# EAGLE board ESP32_breakout v2 (EAGLE 7.7.0)
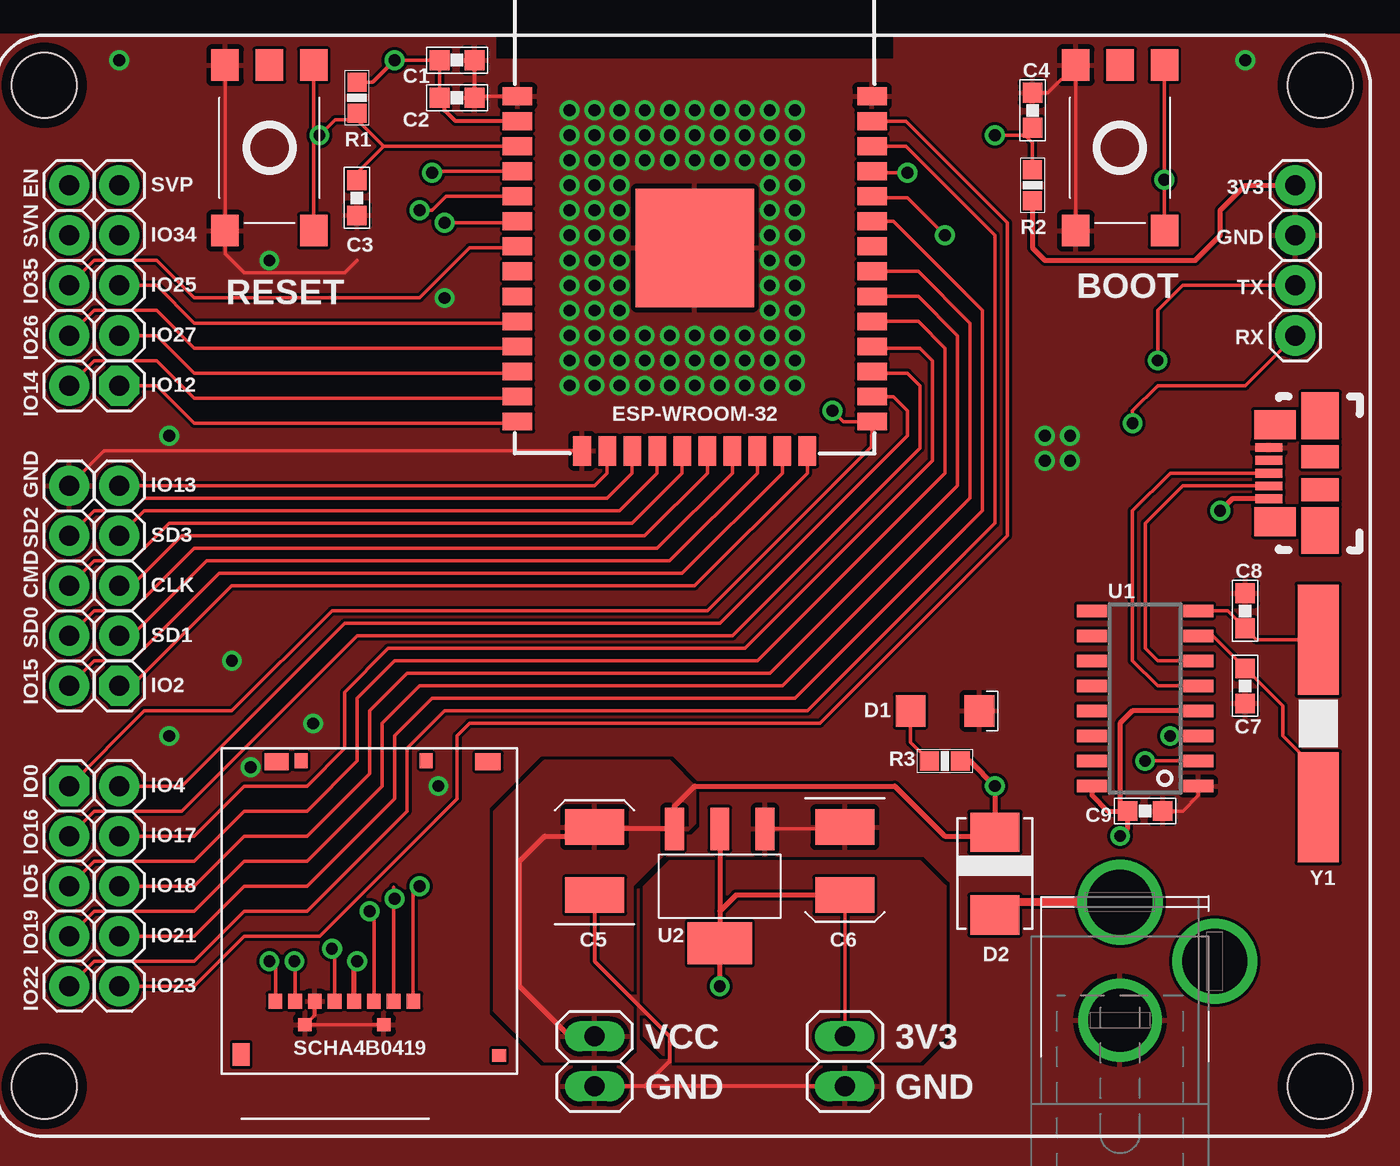
[diagram p0: board, top side]
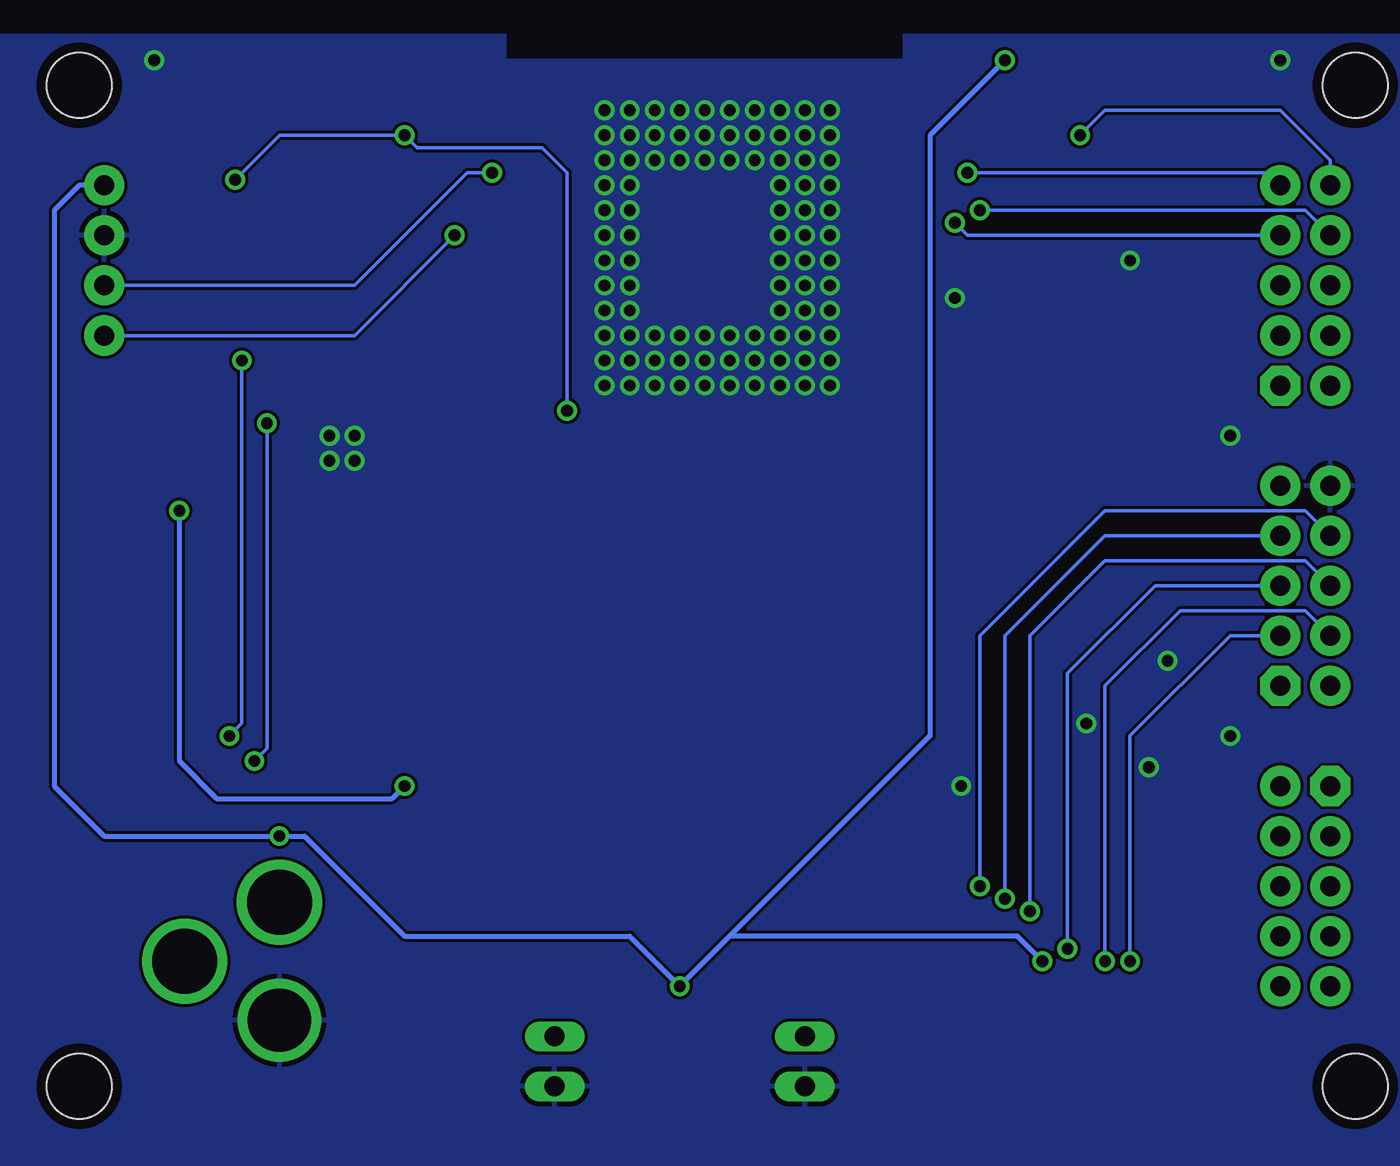
[diagram p1: board, bottom side, seen from below]

No outline drawn. Coordinates in mm, seen from the top.
Copper layers (1*16): Top 0.035mm / dielectric 1.5mm / Bottom 0.035mm
Design rules "embeddedadventures-2layer": minimum track width 6mil, minimum drill 19mil, track to track 6mil, track to pad 6mil, pad to pad 6mil, via to via 6mil, smd to smd 6mil, copper to edge 20mil, drill to drill 8mil, minimum pad ring 8mil, minimum via ring 8mil, stop-mask expansion 1mil, vias tented up to drill 24mil, thermal gap 10mil

## Footprints (pad centres in the part's own frame; a part is rotated, then mirrored left to right if it is on the bottom)
CAP-0603 = smd 1 x 1: 1 -0.889,0; 2 0.889,0
B-3528 = smd 1.8 x 3: N 1.725,0; P -1.725,0
LED-1206 = smd 1.5 x 1.6: A -1.75,0; C 1.75,0
10BQ015PB = smd 2 x 2.5: A 2.1,0; C -2.1,0
SPC4077 = drill 3.2: 1 -3,0 | drill 3.3: 2 0,-4.8; 3 3,0
RES-0603 = smd 0.965 x 0.965: 1 -0.787,0; 2 0.787,0
SKHMQME010 = smd 1.6 x 1.4: 1 -4.2,2.25; 2 4.2,2.25; 3 -4.2,-2.25; 4 4.2,-2.25; 5 4.2,0
ESP-WROOM-32 = smd 0.9 x 1.5: 1 7.7,9; 2 6.43,9; 3 5.16,9; 4 3.89,9; 5 2.62,9; 6 1.35,9; 7 0.08,9; 8 -1.19,9; 9 -2.46,9; 10 -3.73,9; 11 -5,9; 12 -6.27,9; 13 -7.54,9; 14 -8.81,9; 25 -8.81,-9; 26 -7.54,-9; 27 -6.27,-9; 28 -5,-9; 29 -3.73,-9; 30 -2.46,-9; 31 -1.19,-9; 32 0.08,-9; 33 1.35,-9; 34 2.62,-9; 35 3.89,-9; 36 5.16,-9; 37 6.43,-9; 38 7.7,-9 | smd 1.5 x 0.9: 15 -10.3,5.715; 16 -10.3,4.445; 17 -10.3,3.175; 18 -10.3,1.905; 19 -10.3,0.635; 20 -10.3,-0.635; 21 -10.3,-1.905; 22 -10.3,-3.175; 23 -10.3,-4.445; 24 -10.3,-5.715 | smd 6 x 6: GND 0,0
SOT-223-4 = smd 0.95 x 2.15: 1 -2.3,-2.9; 2 0,-2.9; 3 2.3,-2.9 | smd 3.25 x 2.15: PAD 0,2.9
1X02-LONG = drill 1.016 long: 1 -1.27,0; 2 1.27,0
2X05 = drill 1.016 pad 2.032 octagon: 1 -1.27,-2.54 | drill 1.016 pad 2.032: 2 -1.27,0; 3 1.27,-2.54; 4 1.27,0; 5 3.81,-2.54; 6 3.81,0; 7 6.35,-2.54; 8 6.35,0; 9 8.89,-2.54; 10 8.89,0
STAND-OFF-HOLE = hole 3.3: 0,0
MOLEX_47346-001 = smd 1.38 x 0.45: 1 2.61,1.3; 2 2.61,0.65; 3 2.61,0; 4 2.61,-0.65; 5 2.61,-1.3 | smd 2.1 x 1.475: P$1 2.3,2.462; P$2 2.3,-2.462 | smd 1.9 x 1.175: P$3 0,0.838; P$4 0,-0.838 | smd 1.9 x 2.375: P$5 0,2.913; P$6 0,-2.913
SOIC16 = smd 0.635 x 1.524: 1 -4.445,-2.695; 2 -3.175,-2.695; 3 -1.905,-2.695; 4 -0.635,-2.695; 5 0.635,-2.695; 6 1.905,-2.695; 7 3.175,-2.695; 8 4.445,-2.695; 9 4.445,2.695; 10 3.175,2.695; 11 1.905,2.695; 12 0.635,2.695; 13 -0.635,2.695; 14 -1.905,2.695; 15 -3.175,2.695; 16 -4.445,2.695
MICROSD_SCHA4B0419 = smd 0.7 x 0.75: 1 2.225,-12.825; 2 1.225,-12.825; 3 0.225,-12.825; 4 -0.775,-12.825; 5 -1.775,-12.825; 6 -2.775,-12.825; 7 -3.775,-12.825; 8 -4.775,-12.825 | smd 0.7 x 0.65: G1 -3.275,-14.025; G2 0.725,-14.025; P$1 6.575,-15.575 | smd 0.855 x 1.15: P$2 -6.515,-15.525 | smd 1.2 x 0.85: P$3 -4.713,-0.675 | smd 0.65 x 0.75: P$4 -3.475,-0.625; P$5 2.875,-0.625 | smd 1.3 x 0.85: P$6 6.013,-0.675
1X04 = drill 1.016 pad 2.032: 1 -1.27,0; 2 1.27,0; 3 3.81,0; 4 6.35,0
HC-49/US = smd 5.6 x 2.1: P$1 -4.25,0.1; P$2 4.25,0.1

## Placement (x,y rotation side)
C1  10uF  [CAP-0603]  23.5,54.61 0 top
C2  0.1uF  [CAP-0603]  23.5,52.7 0 top
C3  0.1uF  [CAP-0603]  18.41,47.62 270 top
C4  0.1uF  [CAP-0603]  52.7,52.07 90 top
C5  10uF  [B-3528]  30.48,13.97 270 top
C6  10uF  [B-3528]  43.18,13.97 90 top
C7  22pF  [CAP-0603]  63.5,22.86 270 top
C8  22pF  [CAP-0603]  63.5,26.67 90 top
C9  0.1uF  [CAP-0603]  58.42,16.51 180 top
D1  [LED-1206]  48.26,21.59 0 top
D2  DIODE-10BQ015PBF  [10BQ015PB]  50.8,13.34 270 top
J1  [SPC4077]  57.15,8.89 90 top
R1  10k  [RES-0603]  18.41,52.7 90 top
R2  10k  [RES-0603]  52.7,48.26 270 top
R3  330  [RES-0603]  48.26,19.05 0 top
S1  [SKHMQME010]  13.97,50.16 90 top
S2  [SKHMQME010]  57.15,50.16 90 top
U1  ESP-WROOM-32  [ESP-WROOM-32]  35.56,45.09 90 top
U2  NCP-1117  [SOT-223-4]  36.83,12.7 180 top
U$1  M02LONG  [1X02-LONG]  30.48,3.81 90 top
U$2  M102X05  [2X05]  6.35,16.51 270 top
U$3  [STAND-OFF-HOLE]  2.54,53.34 0 top
U$4  MOLEX_USBMICRO  [MOLEX_47346-001]  67.31,33.66 180 top
U$5  M102X05  [2X05]  3.81,39.37 90 top
U$6  [STAND-OFF-HOLE]  2.54,2.54 0 top
U$7  CH340G  [SOIC16]  58.42,22.23 90 top
U$8  SCHA4B0419  [MICROSD_SCHA4B0419]  19.05,19.68 0 top
U$9  M02LONG  [1X02-LONG]  43.18,3.81 90 top
U$10  M04  [1X04]  66.04,41.91 90 top
U$14  [STAND-OFF-HOLE]  67.31,53.34 0 top
U$15  [STAND-OFF-HOLE]  67.31,2.54 0 top
U$17  M102X05  [2X05]  3.81,24.13 90 top
Y1  12MHz  [HC-49/US]  67.31,20.95 90 top

## Library data of the parts
C1-C9 D1 R1-R3 S1 S2 U1 U2 U$1 U$2 U$4 U$5 U$8-U$10 U$17 Y1 = dr-library
D2 J1 U$3 U$6 U$14 U$15 = EmbeddedAdventures 3
U$7 = usb-serial

## Nets
+3V3: C1.1 C2.1 C6.P C9.2 R1.2 R2.2 U1.2 U2.2 U2.PAD U$7.4 U$7.16 U$8.4 U$9.2 U$10.4
CLK: U1.20 U$8.5 U$17.5
CMD: U1.19 U$8.3 U$17.6
EN: C3.1 R1.1 S1.3 S1.4 U1.3 U$5.10
GND: C1.2 C2.2 C3.2 C4.2 C5.N C6.N C7.2 C8.2 C9.1 D1.C J1.1 S1.1 S1.2 S2.1 S2.2 U1.1 U1.15 U1.38 U1.GND U2.1 U$1.1 U$4.5 U$7.1 U$8.6 U$8.G1 U$8.G2 U$9.1 U$10.3 U$17.10
IO0: C4.1 R2.1 S2.3 S2.4 U1.25 U$2.1
IO2: U1.24 U$17.1
IO4: U1.26 U$2.2
IO5: U1.29 U$2.5
IO12: U1.14 U$5.1
IO13: U1.16 U$17.9
IO14: U1.13 U$5.2
IO15: U1.23 U$17.2
IO16: U1.27 U$2.3
IO17: U1.28 U$2.4
IO18: U1.30 U$2.6
IO19: U1.31 U$2.7
IO21: U1.33 U$2.8
IO22: U1.36 U$2.9
IO23: U1.37 U$2.10
IO25: U1.10 U$5.5
IO26: U1.11 U$5.4
IO27: U1.12 U$5.3
IO34: U1.6 U$5.7
IO35: U1.7 U$5.6
N$1: D1.A R3.1
N$2: D2.A J1.3
N$3: C7.1 U$7.7 Y1.P$1
N$4: C8.1 U$7.8 Y1.P$2
N$5: U$4.3 U$7.5
N$6: U$4.2 U$7.6
RX: U1.34 U$7.2 U$10.1
S_VN: U1.5 U$5.8
S_VP: U1.4 U$5.9
SD0: U1.21 U$8.7 U$17.4
SD1: U1.22 U$8.8 U$17.3
SD2: U1.17 U$8.1 U$17.8
SD3: U1.18 U$8.2 U$17.7
TX: U1.35 U$7.3 U$10.2
VCC: C5.P D2.C R3.2 U2.3 U$1.2 U$4.1

## Tracks (layer width: path | path; a pad name or v marks a point on that pad's centre or on a via)
+3V3  (via drill 0.6)
  Top 0.178: 22.61,52.32 C2.1 C1.1 v20.32,54.61 | R1.2 19.2,53.49 | 57.15,16.89 C9.2 | U$9.2 C6.P
  Top 0.203: U1.2 23.41,51.52 22.86,52.07 22.86,52.45 C2.1 | v20.32,54.61 19.2,53.49
  Top 0.254: U$7.16 55.73,17.3 56.52,16.51 C9.2 57.53,15.62 v57.15,15.24 | U$7.4 57.78,21.59 57.15,20.95 57.15,16.89 | R2.2 52.7,45.09 53.34,44.45 60.96,44.45 62.23,45.72 62.23,46.99 63.5,48.26 U$10.4 | U$8.4 18.27,8.75 v18.41,8.89 | v36.83,7.62 U2.PAD 36.83,11.43 | U2.2 36.83,11.43 | C6.P 37.65,12.24 36.83,11.43
  Bottom 0.178: 34.29,10.16 v36.83,7.62
  Bottom 0.254: v18.41,8.89 19.68,10.16 34.29,10.16 | U$10.4 67.31,48.26 68.58,46.99 68.58,17.78 66.04,15.24 v57.15,15.24 55.88,15.24 50.8,10.16 39.37,10.16 v36.83,7.62 24.13,20.32 24.13,50.8 v20.32,54.61
CLK  (via drill 0.6)
  Top 0.178: U$17.5 6.99,27.94 9.53,30.48 33.02,30.48 36.2,33.66 U1.20 | U$8.5 17.27,9.39 v17.14,9.53
  Bottom 0.178: v17.14,9.53 17.14,23.5 12.7,27.94 U$17.5
CMD  (via drill 0.6)
  Top 0.178: U$17.6 5.08,29.21 6.99,29.21 8.89,31.11 32.38,31.11 34.92,33.66 U1.19 | U$8.3 19.27,11.21 v19.05,11.43
  Bottom 0.178: v19.05,11.43 19.05,25.4 15.24,29.21 5.08,29.21 U$17.6
EN  (via drill 0.6)
  Top 0.178: C3.1 18.41,48.9 19.77,50.24 | U1.3 19.77,50.24 | R1.1 18.41,51.59 | 18.41,51.59 19.77,50.24 | S1.4 16.22,51.09 v16.51,50.8 | S1.3 16.22,50.51 v16.51,50.8 | 18.41,51.59 17.3,51.59 v16.51,50.8
  Bottom 0.178: U$5.10 3.81,49.53 6.35,52.07 15.24,52.07 v16.51,50.8
GND  (via drill 0.6)
  Top 0.178: S1.2 S1.1 11.72,44.8 12.7,43.81 17.78,43.81 18.41,44.45 | U1.1 24.46,52.78 C2.2 C1.2 | U$7.1 61.12,17.3 60.33,16.51 C9.1 | S2.1 S2.2 53.49,52.96 C4.2 | U$8.6 16.27,6.16 U$8.G1 U$8.G2 | U2.1 43.09,15.6 C6.N | U1.15 5.58,34.78 U$17.10
  Top 0.203: C5.N 30.48,8.89 34.29,5.08 34.29,3.81 33.02,2.54 | 33.02,2.54 U$1.1 | U$9.1 33.02,2.54
  other vias: 13.02,18.73 12.06,24.13 31.75,49.53 33.02,49.53 34.29,49.53 35.56,49.53 36.83,49.53 38.1,49.53 39.37,49.53 40.64,49.53 40.64,48.26 39.37,48.26 40.64,46.99 39.37,46.99 39.37,45.72 39.37,44.45 39.37,43.18 39.37,41.91 39.37,40.64 40.64,45.72 40.64,44.45 40.64,43.18 40.64,41.91 40.64,40.64 40.64,39.37 39.37,39.37 40.64,38.1 39.37,38.1 38.1,38.1 36.83,38.1 35.56,38.1 34.29,38.1 33.02,38.1 31.75,38.1 30.48,38.1 29.21,38.1 29.21,39.37 29.21,40.64 29.21,41.91 29.21,43.18 29.21,44.45 29.21,45.72 29.21,46.99 29.21,48.26 29.21,49.53 30.48,49.53 30.48,50.8 29.21,50.8 29.21,52.07 30.48,52.07 31.75,52.07 31.75,50.8 33.02,50.8 33.02,52.07 34.29,52.07 34.29,50.8 35.56,50.8 35.56,52.07 36.83,52.07 36.83,50.8 38.1,50.8 38.1,52.07 39.37,52.07 39.37,50.8 40.64,50.8 40.64,52.07 30.48,48.26 30.48,46.99 30.48,45.72 30.48,44.45 30.48,43.18 30.48,41.91 30.48,40.64 30.48,39.37 31.75,39.37 31.75,40.64 31.75,41.91 31.75,43.18 31.75,44.45 31.75,45.72 31.75,46.99 31.75,48.26 33.02,40.64 33.02,39.37 34.29,39.37 34.29,40.64 35.56,40.64 35.56,39.37 36.83,39.37 36.83,40.64 38.1,40.64 38.1,39.37 16.19,20.95 8.89,35.56 13.97,44.45 6.35,54.61 63.5,54.61 53.34,35.56 53.34,34.29 54.61,34.29 54.61,35.56 22.54,17.78 22.86,42.55 8.89,20.32
  pour Top (rank 2): -2.54,55.88 25.4,55.88 25.4,54.61 45.72,54.61 45.72,55.88 72.39,55.88 72.39,-2.54 -2.54,-2.54
  pour Bottom (rank 2): -2.54,55.88 -2.54,-2.54 72.39,-2.54 72.39,55.88 45.72,55.88 45.72,54.61 26.67,54.61 25.4,54.61 25.4,55.88
IO0  (via drill 0.6)
  Top 0.178: S2.4 v59.4,48.55 S2.3 | U$2.1 7.62,21.59 12.06,21.59 17.14,26.67 36.2,26.67 44.53,35.01 U1.25 43.1,36.27 v42.55,36.83 | v50.8,50.8 52.32,50.8 | 52.32,50.8 C4.1 | R2.1 52.7,50.42 52.32,50.8
  Bottom 0.178: v42.55,36.83 42.55,48.9 43.81,50.16 50.16,50.16 v50.8,50.8 57.15,50.8 v59.4,48.55
IO2
  Top 0.178: U$17.1 6.99,22.86 12.06,27.94 35.56,27.94 41.27,33.66 U1.24
IO4
  Top 0.178: U$2.2 9.53,17.78 17.78,26.04 36.83,26.04 46.35,35.56 46.35,36.83 45.64,37.55 U1.26
IO5
  Top 0.178: U1.29 46.91,41.35 48.26,40.01 48.26,33.66 38.73,24.13 20.32,24.13 18.41,22.23 18.41,19.05 15.88,16.51 12.7,16.51 10.16,13.97 5.08,13.97 U$2.5
IO12
  Top 0.178: U$5.1 8.26,38.1 10.16,36.2 26.48,36.2 U1.14
IO13
  Top 0.178: U$17.9 30.48,33.02 31.11,33.66 U1.16
IO14
  Top 0.178: U$5.2 5.08,39.37 8.26,39.37 10.16,37.47 26.48,37.47 U1.13
IO15
  Top 0.178: U$17.2 5.08,24.13 6.99,24.13 11.43,28.57 34.92,28.57 40.01,33.66 U1.23
IO16
  Top 0.178: U1.27 44.64,38.73 46.35,38.73 46.99,38.1 46.99,34.92 37.47,25.4 18.41,25.4 9.53,16.51 5.08,16.51 U$2.3
IO17
  Top 0.178: U1.28 44.64,40.01 46.99,40.01 47.62,39.37 47.62,34.29 38.1,24.77 20,24.77 17.78,22.54 17.78,19.68 15.88,17.78 12.7,17.78 10.16,15.24 U$2.4
IO18
  Top 0.178: U1.30 46.91,42.62 48.9,40.64 48.9,33.02 39.37,23.5 20.95,23.5 19.05,21.59 19.05,18.41 15.88,15.24 12.7,15.24 10.16,12.7 U$2.6
IO19
  Top 0.178: U1.31 46.91,43.9 49.53,41.27 49.53,32.38 40.01,22.86 21.59,22.86 19.68,20.95 19.68,17.78 15.88,13.97 12.7,13.97 10.16,11.43 5.08,11.43 U$2.7
IO21
  Top 0.178: U1.33 45.64,46.44 50.16,41.91 50.16,31.75 40.64,22.23 22.23,22.23 20.32,20.32 20.32,17.14 15.88,12.7 12.7,12.7 10.16,10.16 U$2.8
IO22
  Top 0.178: U$2.9 5.08,8.89 10.16,8.89 12.7,11.43 15.88,11.43 20.95,16.51 20.95,19.68 22.86,21.59 41.27,21.59 50.8,31.11 50.8,45.72 46.27,50.24 U1.36
IO23
  Top 0.178: U$2.10 10.16,7.62 12.7,10.16 16.51,10.16 23.5,17.14 23.5,20.32 24.13,20.95 41.91,20.95 51.44,30.48 51.44,46.35 46.27,51.52 U1.37
IO25
  Top 0.178: U$5.5 8.26,43.18 10.16,41.27 26.48,41.27 U1.10
IO26
  Top 0.178: U$5.4 5.08,41.91 8.26,41.91 10.16,40.01 26.48,40.01 U1.11
IO27
  Top 0.178: U$5.3 8.26,40.64 10.16,38.73 26.48,38.73 U1.12
IO34  (via drill 0.6)
  Top 0.178: v22.86,46.35 26.48,46.35 U1.6
  Bottom 0.178: U$5.7 22.23,45.72 v22.86,46.35
IO35
  Top 0.178: U$5.6 5.08,44.45 8.26,44.45 10.16,42.55 21.59,42.55 24.13,45.09 26.48,45.09 U1.7
N$1
  Top 0.178: D1.A 46.51,20.01 R3.1
N$2
  Top 0.178: 51.45,11.89 D2.A
  Top 0.406: J1.3 51.45,11.89
N$3
  Top 0.178: Y1.P$1 67.21,18.52 65.41,20.32 65.41,21.84 C7.1 61.85,25.4 U$7.7
N$4
  Top 0.178: Y1.P$2 64.08,25.2 C8.1 62.61,26.67 U$7.8
N$5
  Top 0.178: U$7.5 59.05,22.86 57.78,24.13 57.78,31.75 59.69,33.66 U$4.3
N$6
  Top 0.178: U$7.6 59.05,24.13 58.42,24.77 58.42,31.11 60.33,33.02 64.69,33.02 U$4.2
N$7
  pour Top: 34.29,13.97 46.99,13.97 48.26,12.7 48.26,5.08 46.99,3.81 34.29,3.81 33.02,5.08 33.02,12.7
RX  (via drill 0.6)
  Top 0.178: v48.26,45.72 46.35,47.62 44.64,47.62 U1.34 | U$7.2 v58.42,19.05 | v57.78,36.2 57.78,36.83 59.05,38.1 63.5,38.1 U$10.1
  Bottom 0.178: U$10.1 53.34,40.64 v48.26,45.72 | v58.42,19.05 57.78,19.68 v57.78,36.2
S_VN  (via drill 0.6)
  Top 0.178: v21.59,46.99 22.23,46.99 22.94,47.7 U1.5
  Bottom 0.178: U$5.8 5.08,46.99 v21.59,46.99
S_VP  (via drill 0.6)
  Top 0.178: U1.4 22.3,48.98 v22.23,48.9
  Bottom 0.178: v22.23,48.9 6.99,48.9 U$5.9
SD0  (via drill 0.6)
  Top 0.178: U$17.4 5.08,26.67 6.99,26.67 10.16,29.84 33.66,29.84 37.47,33.66 U1.21 | U$8.7 15.28,8.86 v15.24,8.89
  Bottom 0.178: v15.24,8.89 15.24,22.86 11.43,26.67 5.08,26.67 U$17.4
SD1  (via drill 0.6)
  Top 0.178: U$17.3 6.99,25.4 10.79,29.21 34.29,29.21 38.73,33.66 U1.22 | U$8.8 14.28,8.59 v13.97,8.89
  Bottom 0.178: v13.97,8.89 13.97,20.32 8.89,25.4 U$17.3
SD2  (via drill 0.6)
  Top 0.178: U$17.8 5.08,31.75 6.99,31.75 7.62,32.38 31.11,32.38 32.38,33.66 U1.17 | U$8.1 21.27,12.38 v21.59,12.7
  Bottom 0.178: v21.59,12.7 21.59,25.4 15.24,31.75 5.08,31.75 U$17.8
SD3  (via drill 0.6)
  Top 0.178: U$17.7 7.62,31.75 31.75,31.75 33.66,33.66 U1.18 | U$8.2 20.27,12.65 v20.32,12.06
  Bottom 0.178: v20.32,12.06 20.32,25.4 15.24,30.48 U$17.7
TX  (via drill 0.6)
  Top 0.178: v46.35,48.9 44.64,48.9 U1.35 | U$7.3 v59.69,20.32 | v59.05,39.37 59.05,41.91 60.33,43.18 U$10.2
  Bottom 0.178: U$10.2 53.34,43.18 47.62,48.9 v46.35,48.9 | v59.69,20.32 59.05,20.95 v59.05,39.37
VCC  (via drill 0.6)
  Top 0.178: 30.02,15.24 C5.P 30.57,15.6 | 50.6,15.24 D2.C
  Top 0.254: R3.2 49.53,19.05 v50.8,17.78 D2.C | U$1.2 29.21,5.08 26.67,7.62 26.67,13.97 27.94,15.24 30.02,15.24 | 30.57,15.6 U2.3 34.53,16.75 35.56,17.78 45.72,17.78 48.26,15.24 50.6,15.24 | U$4.1 62.84,32.35 v62.23,31.75
  Bottom 0.254: v62.23,31.75 62.23,19.05 60.33,17.14 51.44,17.14 v50.8,17.78
  pour Top: 32.38,4.45 31.75,3.81 27.94,3.81 25.4,6.35 25.4,16.51 27.94,19.05 34.29,19.05 35.56,17.78 35.56,15.88 32.38,12.7

## Text on the board
tPlace: 3V3 | EN | SVP | GND | SVN | IO34 | IO25 | BOOT | TX | IO35 | RESET | RX | IO27 | IO26 | IO12 | IO14 | IO13 | GND | SD2 | SD3 | CLK | CMD | U1 | SD0 | SD1 | IO2 | IO15 | IO0 | IO4 | IO17 | IO16 | IO5 | IO18 | IO21 | IO19 | D2 | IO23 | IO22 | VCC | 3V3 | GND | GND